# EAGLE board P0.1 (EAGLE 6.5.0)
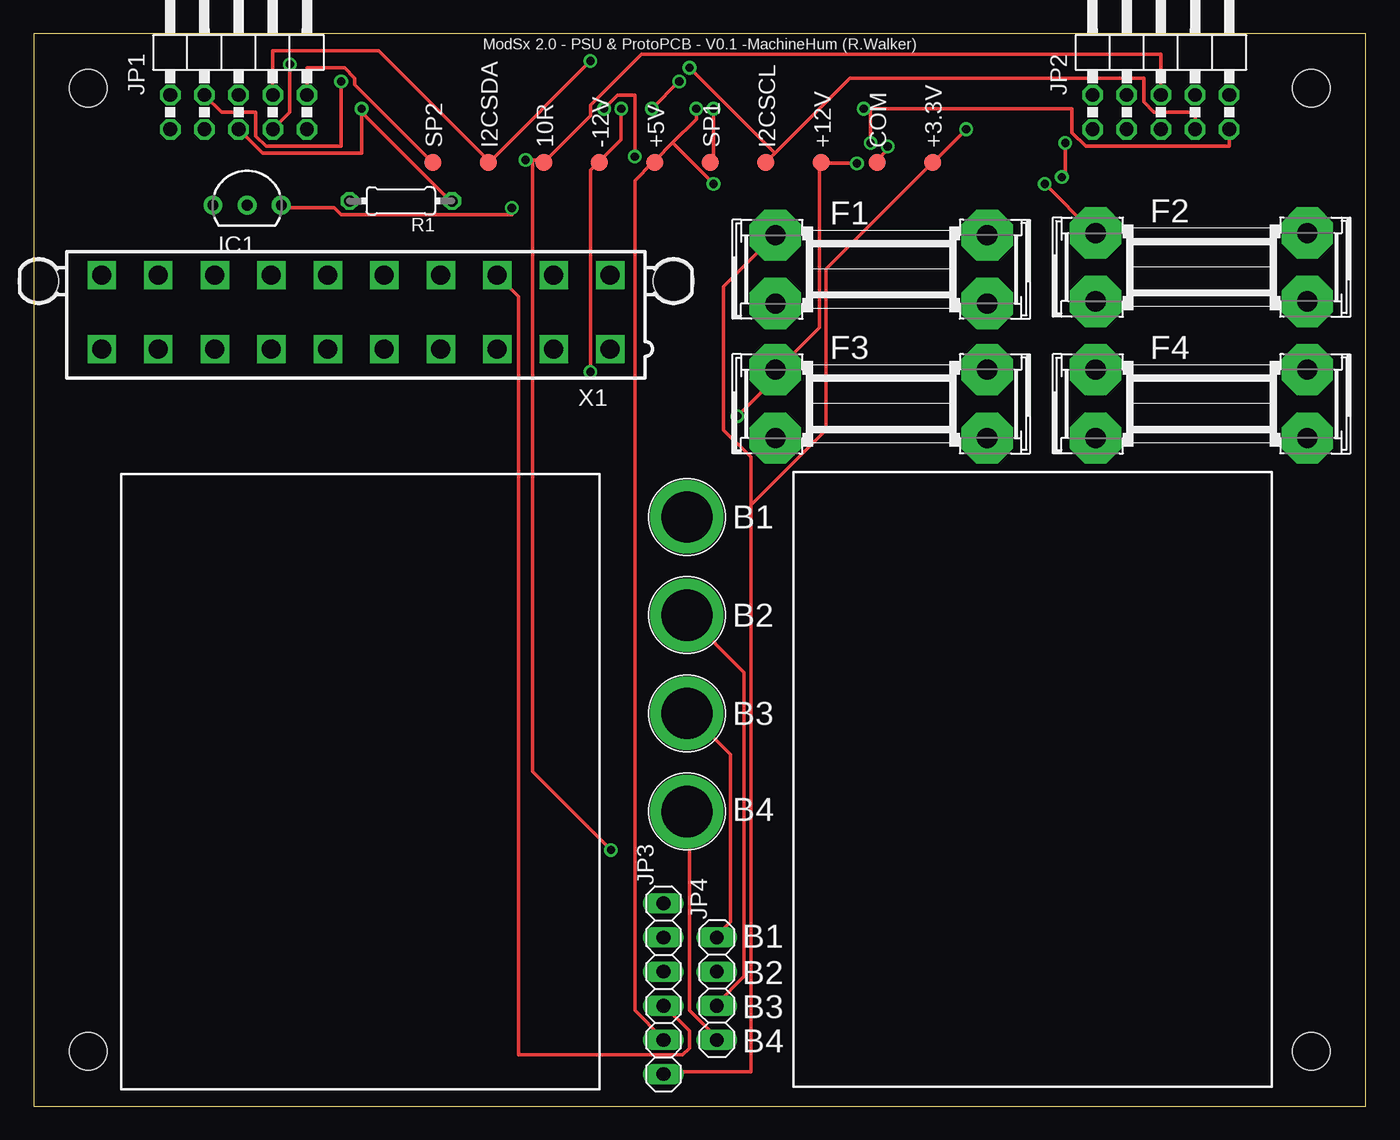
[diagram p0: board, top side]
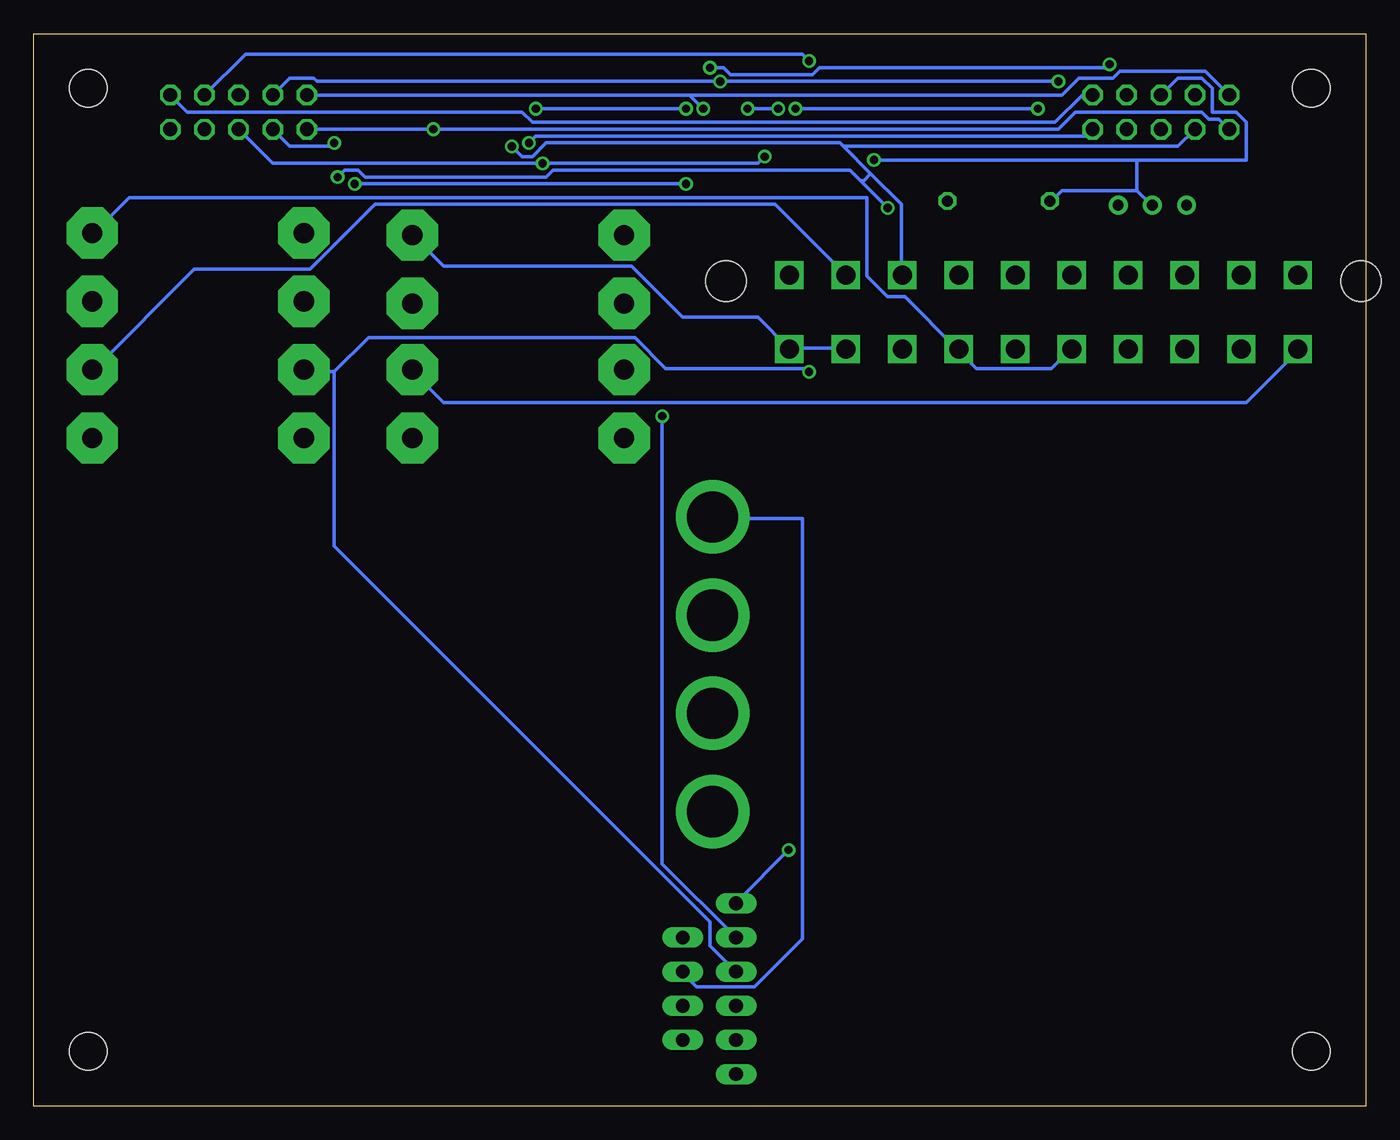
[diagram p1: board, bottom side, seen from below]

Size 99.06 x 79.76 mm. Coordinates in mm from the lower left corner, seen from the top.
Outline: 0,0 99.06,0 99.06,79.76 0,79.76 0,0
Copper layers (1*16): Top 0.035mm / dielectric 1.5mm / Bottom 0.035mm
Design rules "default": minimum track width 10mil, minimum drill 24mil, track to track 8mil, track to pad 8mil, pad to pad 8mil, via to via 8mil, smd to smd 8mil, copper to edge 40mil, drill to drill 8mil, minimum pad ring 10mil, minimum via ring 8mil, stop-mask expansion 4mil, vias tented up to drill 0mil, thermal gap 10mil
Holes 2.8 mm at 4.06,75.69 95,75.69 4.06,4.06 95,4.06

## Footprints (pad centres in the part's own frame; a part is rotated, then mirrored left to right if it is on the bottom)
B1,27 = smd 1.27 x 1.27: TP 0,0
SHK20Q = drill 1.5 pad 3.81 octagon: 1A -7.874,2.54; 1B -7.874,-2.54; 2A 7.874,2.54; 2B 7.874,-2.54
LP_O-PBCY-W3 = drill 0.8 pad 1.4: 1 -2.54,0; 2 0,0; 3 2.54,0
BANANA_CONN = drill 3.81 pad 5.461: P$1 0,0
2X05/90 = drill 1.016 octagon: 1 -5.08,-6.35; 2 -5.08,-3.81; 3 -2.54,-6.35; 4 -2.54,-3.81; 5 0,-6.35; 6 0,-3.81; 7 2.54,-6.35; 8 2.54,-3.81; 9 5.08,-6.35; 10 5.08,-3.81
1X06 = drill 1.016 long: 1 -6.35,0; 2 -3.81,0; 3 -1.27,0; 4 1.27,0; 5 3.81,0; 6 6.35,0
1X04 = drill 1.016 long: 1 -3.81,0; 2 -1.27,0; 3 1.27,0; 4 3.81,0
0204/7 = drill 0.813 octagon: 1 -3.81,0; 2 3.81,0
5566-20 = drill 1.4 square: 1 18.9,-2.75; 2 14.7,-2.75; 3 10.5,-2.75; 4 6.3,-2.75; 5 2.1,-2.75; 6 -2.1,-2.75; 7 -6.3,-2.75; 8 -10.5,-2.75; 9 -14.7,-2.75; 10 -18.9,-2.75; 11 18.9,2.75; 12 14.7,2.75; 13 10.5,2.75; 14 6.3,2.75; 15 2.1,2.75; 16 -2.1,2.75; 17 -6.3,2.75; 18 -10.5,2.75; 19 -14.7,2.75; 20 -18.9,2.75 | hole 3: 23.6,2.29; -23.6,2.29

## Placement (x,y rotation side)
10R  PTR1B1,27  [B1,27]  37.94,70.17 270 top
+3.3V  PTR1B1,27  [B1,27]  66.83,70.17 270 top
+5V  PTR1B1,27  [B1,27]  46.2,70.17 270 top
+12V  PTR1B1,27  [B1,27]  58.58,70.17 270 top
-12V  PTR1B1,27  [B1,27]  42.07,70.17 270 top
COM  PTR1B1,27  [B1,27]  62.71,70.17 270 top
F1  FUSESHK20Q  [SHK20Q]  63.02,62.23 0 top
F2  FUSESHK20Q  [SHK20Q]  86.84,62.39 0 top
F3  FUSESHK20Q  [SHK20Q]  63.02,52.23 0 top
F4  FUSESHK20Q  [SHK20Q]  86.84,52.23 0 top
I2CSCL  PTR1B1,27  [B1,27]  54.45,70.17 270 top
I2CSDA  PTR1B1,27  [B1,27]  33.81,70.17 270 top
IC1  LM4041A12LP  [LP_O-PBCY-W3]  15.88,66.99 0 top
J1  [BANANA_CONN]  48.58,43.81 0 top
J2  [BANANA_CONN]  48.58,36.51 0 top
J3  [BANANA_CONN]  48.58,29.21 0 top
J4  [BANANA_CONN]  48.58,21.91 0 top
JP1  [2X05/90]  15.24,78.99 0 top
JP2  [2X05/90]  83.82,78.99 0 top
JP3  [1X06]  46.83,8.73 90 top
JP4  [1X04]  50.8,8.73 270 top
R1  ?k  [0204/7]  27.3,67.31 180 top
SP1  PTR1B1,27  [B1,27]  50.32,70.17 270 top
SP2  PTR1B1,27  [B1,27]  29.69,70.17 270 top
U$1  BREADBOARDMINI  [BREADBOARD-MINI]  92.08,1.43 90 top
U$2  BREADBOARDMINI  [BREADBOARD-MINI]  42.07,1.27 90 top
X1  5566-20  [5566-20]  23.97,59.05 0 top

## Library data of the parts
10R +3.3V +5V +12V -12V COM I2CSCL I2CSDA SP1 SP2 = testpad
F1-F4 = fuse; OC_FARNELL: unknown; OC_NEWARK: unknown
IC1 = texas; OC_FARNELL: 9486119; OC_NEWARK: unknown
J1-J4 = SparkFun-Connectors
JP1-JP4 = pinhead+
R1 = rcl
U$1 U$2 = SparkFun-Boards; PROD_ID: COMP-12034
X1 = con-molex; OC_FARNELL: unknown; OC_NEWARK: unknown

## Nets
10VREF: 10R.TP IC1.2 JP1.6 JP2.6 JP3.6 R1.2
+3.3V: +3.3V.TP F1.1A JP1.1 JP2.1 JP3.1
+5.0V: +5V.TP F2.1A JP1.2 JP2.2 JP3.2
+12V: +12V.TP F3.1A JP1.5 JP2.5 JP3.5 R1.1
-12V: -12V.TP F4.1A JP1.4 JP2.4 JP3.4
GND: COM.TP IC1.3 JP1.3 JP2.3 JP3.3 X1.13
I2CSCL: I2CSCL.TP JP1.7 JP2.7
I2CSDA: I2CSDA.TP JP1.8 JP2.8
N$1: F2.2A X1.4 X1.6
N$2: F3.2A X1.10
N$3: F4.2A X1.12
N$4: J3.P$1 JP4.1
N$5: F1.2A X1.1 X1.2
N$6: J1.P$1 JP4.2
N$7: J2.P$1 JP4.3
N$8: J4.P$1 JP4.4
SPARE1: JP1.9 JP2.9 SP1.TP
SPARE2: JP1.10 JP2.10 SP2.TP

## Tracks (layer width: path | path; a pad name or v marks a point on that pad's centre or on a via)
10VREF  (via drill 0.61)
  Top 0.254: JP2.6 83.82,78.23 45.21,78.23 41.4,74.42 41.4,73.66 38.1,70.36 10R.TP 37.85,70.36 37.08,70.36 | 37.08,70.36 v36.58,70.36 | v42.93,19.05 37.08,24.89 37.08,70.36
  Bottom 0.254: JP1.6 13.97,76.45 12.19,76.45 11.43,75.69 11.43,73.91 9.65,73.91 8.89,73.15 8.89,70.36 17.02,70.36 | v36.58,70.36 17.02,70.36 | v42.93,19.05 46.74,15.24 JP3.6 | 17.02,68.07 22.61,68.07 23.37,67.31 R1.2 | 17.02,68.07 16,67.06 IC1.2 | 17.02,70.36 17.02,68.07
+3.3V  (via drill 0.61)
  Top 0.254: v69.34,72.64 67.06,70.36 +3.3V.TP 66.8,70.1 58.93,62.23 58.93,50.29 53.34,44.7 | 53.34,44.7 53.34,48.26 51.31,50.29 51.31,60.96 55.12,64.77 F1.1A | 53.34,44.7 53.34,2.54 46.99,2.54 JP3.1
  Bottom 0.254: JP2.1 v69.34,72.64 22.86,72.64 21.59,73.91 12.19,73.91 11.68,73.41 10.92,73.41 JP1.1
+5.0V  (via drill 0.61)
  Top 0.254: 47.5,71.63 49.28,73.41 v49.28,74.17 | 47.5,71.63 46.23,70.36 +5V.TP 45.97,70.1 44.7,68.83 44.7,7.11 46.74,5.08 JP3.2 | v75.18,68.58 78.74,65.02 F2.1A | 47.5,71.63 v50.55,68.58
  Bottom 0.254: 50.29,75.18 v49.28,74.17 | JP2.2 50.29,75.18 | JP1.2 11.94,76.96 18.29,76.96 18.8,76.45 21.34,76.45 22.61,75.18 50.29,75.18 | v50.55,68.58 v75.18,68.58
+12V  (via drill 0.61)
  Top 0.254: v61.21,70.1 58.67,70.1 +12V.TP 58.42,70.1 58.42,57.91 55.37,54.86 F3.1A 55.12,54.61 55.12,54.1 v52.32,51.31 | JP1.5 17.02,70.87 24.38,70.87 24.38,73.91 | v42.42,74.17 43.43,75.18 44.7,75.18 v44.7,70.61 | 24.38,73.91 30.99,67.31 R1.1 | 24.38,73.91 v24.38,74.17
  Bottom 0.254: JP2.5 81.28,70.1 v61.21,70.1 45.21,70.1 v44.7,70.61 | v42.42,74.17 v24.38,74.17 | JP3.5 52.32,18.03 v52.32,51.31
-12V  (via drill 0.61)
  Top 0.254: v43.69,74.17 43.69,71.88 42.16,70.36 -12V.TP 41.91,70.1 41.4,69.6 v41.4,54.61 | v48.01,76.2 v45.97,74.17 | JP1.4 13.97,73.91 16.51,73.91 16.51,72.14 17.27,71.37 22.86,71.37 v22.86,76.2
  Bottom 0.254: v45.97,74.17 v43.69,74.17 | JP2.4 80.01,76.45 78.23,76.45 77.98,76.2 v48.01,76.2 v22.86,76.2 | JP3.4 48.77,11.94 48.77,13.72 76.71,41.66 76.71,54.61 | 76.71,54.61 78.74,54.61 F4.1A | v41.4,54.61 41.66,54.86 52.07,54.86 54.36,57.15 74.17,57.15 76.71,54.61
GND  (via drill 0.61)
  Top 0.254: v35.56,66.8 35.56,66.29 22.86,66.29 22.35,66.8 18.54,66.8 IC1.3 | v76.45,69.09 76.71,69.34 v76.71,71.63 | v63.5,71.37 63.5,71.12 62.74,70.36 COM.TP | JP3.3 46.99,7.37 48.77,5.59 48.77,4.32 48.26,3.81 36.07,3.81 36.07,60.2 34.54,61.72 X1.13
  Bottom 0.254: 37.59,68.83 38.35,69.6 60.45,69.6 60.96,69.09 74.42,69.09 74.93,69.6 75.95,69.6 v76.45,69.09 | 37.59,68.83 v35.56,66.8 | v76.71,71.63 76.96,71.37 80.01,71.37 JP2.3 | v63.5,71.37 62.74,70.61 61.98,70.61 60.96,71.63 39.12,71.63 38.86,71.37 | 36.83,69.34 34.54,67.06 34.54,61.98 X1.13 | 36.83,69.34 38.86,71.37 | 38.86,71.37 13.97,71.37 JP1.3 | 36.83,69.34 37.34,68.83 37.59,68.83
I2CSCL  (via drill 0.61)
  Top 0.254: 55.12,70.87 60.71,76.45 82.55,76.45 82.55,74.68 83.31,73.91 86.36,73.91 JP2.7 | 55.12,70.87 54.61,70.36 I2CSCL.TP | JP1.7 19.05,73.91 v19.05,77.47 | 55.12,70.87 v48.77,77.22
  Bottom 0.254: v19.05,77.47 19.3,77.22 40.64,77.22 41.15,76.71 47.24,76.71 47.75,77.22 v48.77,77.22
I2CSDA  (via drill 0.61)
  Top 0.254: JP1.8 17.78,78.49 25.65,78.49 33.78,70.36 I2CSDA.TP 34.04,70.36 v41.4,77.72
  Bottom 0.254: JP2.8 83.31,78.23 41.91,78.23 v41.4,77.72
N$1
  Bottom 0.254: X1.6 22.1,56.13 23.37,54.86 28.96,54.86 30.23,56.13 X1.4 30.48,56.39 34.29,60.2 35.56,60.2 37.08,61.72 37.08,67.56 91.95,67.56 94.49,65.02 F2.2A
N$2
  Bottom 0.254: X1.10 5.08,56.13 8.89,52.32 68.58,52.32 70.87,54.61 F3.2A
N$3
  Bottom 0.254: X1.12 38.86,61.98 43.94,67.06 73.66,67.06 78.49,62.23 87.12,62.23 94.49,54.86 F4.2A
N$4
  Top 0.254: JP4.1 50.8,12.7 51.82,13.72 51.82,26.16 48.77,29.21 J3.P$1
N$5
  Bottom 0.254: X1.2 38.86,56.39 42.67,56.39 X1.1 42.93,56.39 45.21,58.67 50.8,58.67 54.61,62.48 68.58,62.48 70.87,64.77 F1.2A
N$6
  Bottom 0.254: JP4.2 50.8,9.91 49.78,8.89 45.47,8.89 41.91,12.45 41.91,43.69 48.51,43.69 J1.P$1
N$7
  Top 0.254: J2.P$1 52.83,32.26 52.83,9.65 50.8,7.62 JP4.3
N$8
  Top 0.254: JP4.4 50.8,5.08 48.77,7.11 48.77,21.84 J4.P$1
SPARE1  (via drill 0.61)
  Top 0.254: v50.55,74.17 50.55,70.36 SP1.TP | 62.23,74.17 77.22,74.17 77.22,72.39 78.23,71.37 88.9,71.37 JP2.9 | 62.23,74.17 v61.72,74.17 | 62.23,74.17 v62.23,71.63
  Bottom 0.254: v61.72,74.17 v50.55,74.17 | JP1.9 20.83,72.14 61.72,72.14 v62.23,71.63
SPARE2
  Top 0.254: JP1.10 20.32,77.22 23.11,77.22 23.88,76.45 23.88,75.95 29.46,70.36 SP2.TP
  Bottom 0.254: JP2.10 87.63,73.91 62.74,73.91 61.98,73.15 23.11,73.15 21.08,75.18 JP1.10

## Text on the board
tPlace: ModSx 2.0 - PSU & ProtoPCB - V0.1 -MachineHum (R.Walker)
tNames: B1 | B2 | B3 | B4 | B1 | B2 | B3 | B4